# EAGLE board Adafruit-MacroPad-2040-rev-D (EAGLE 9.6.2)
REV: D
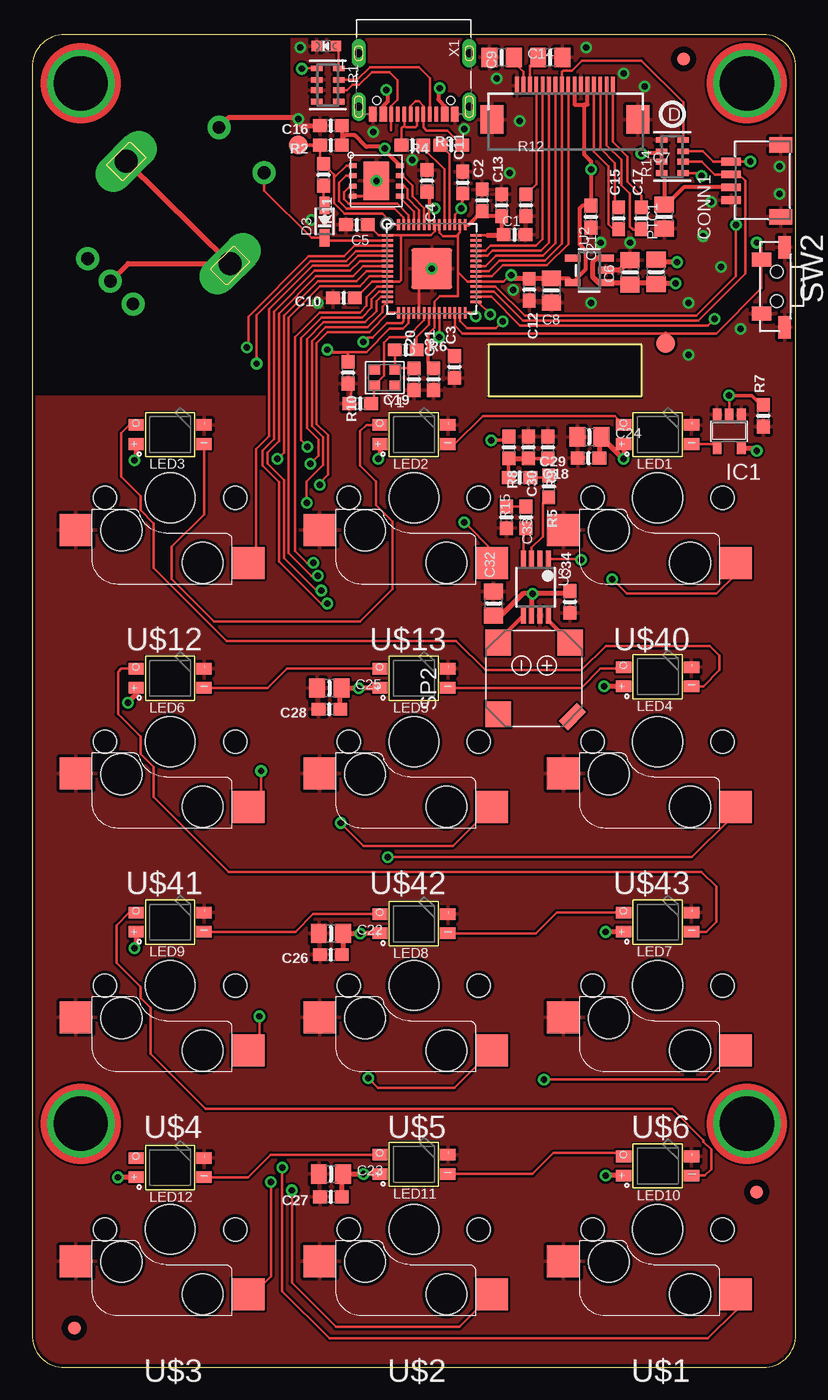
[diagram p0: board, top side]
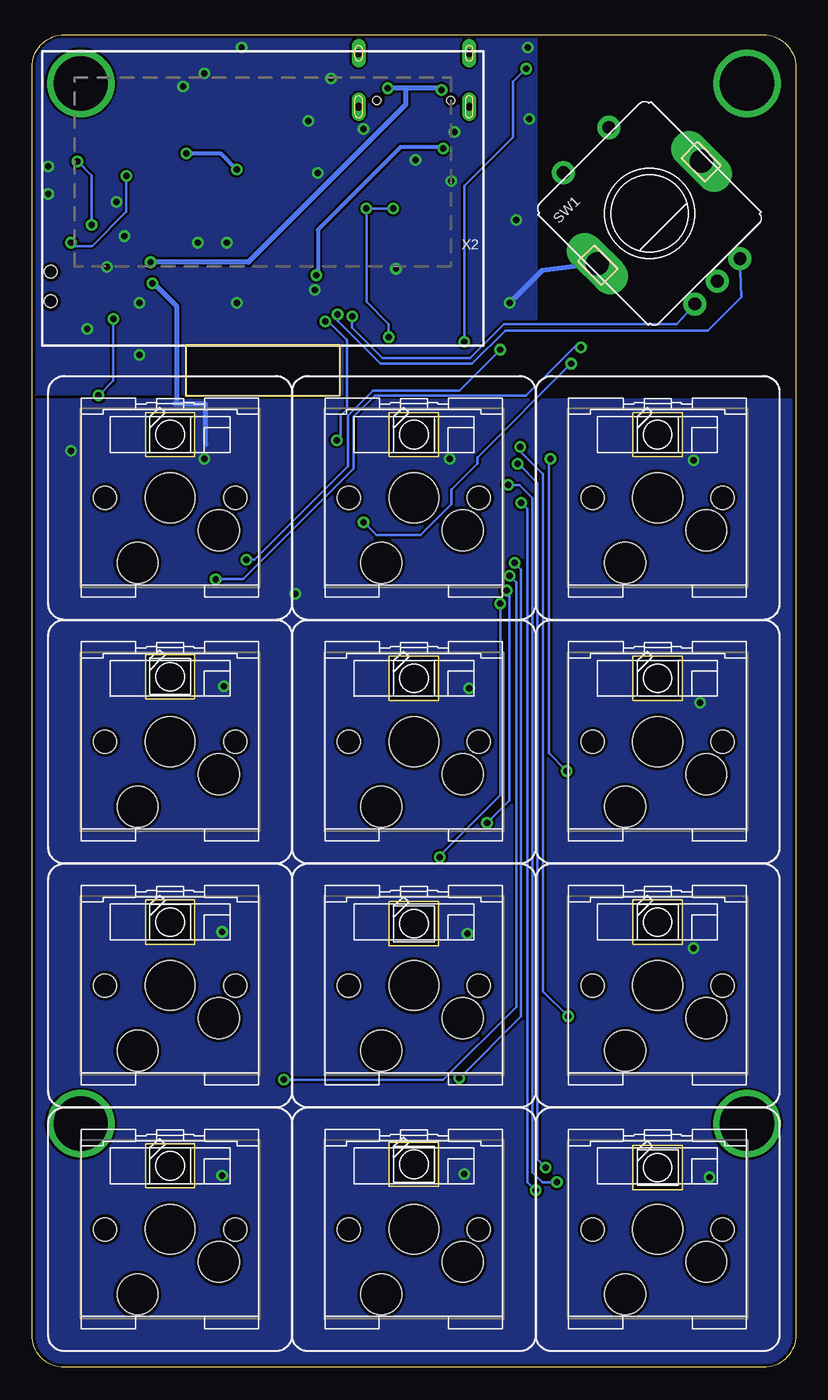
[diagram p1: board, bottom side, seen from below]

Size 59.69 x 104.14 mm. Coordinates in mm from the lower left corner, seen from the top.
Outline: 0,101.6 0,2.54 arc90 2.54,0 57.15,0 arc90 59.69,2.54 59.69,101.6 arc90 57.15,104.14 2.54,104.14 arc90 0,101.6
Copper layers (1*16): Top 0.035mm / dielectric 1.5mm / Bottom 0.035mm
Design rules "adafruit 7-7": minimum track width 7mil, minimum drill 15.5mil, track to track 7mil, track to pad 7mil, pad to pad 7mil, via to via 7mil, smd to smd 7mil, copper to edge 10mil, drill to drill 8mil, minimum pad ring 10mil, minimum via ring 8mil, stop-mask expansion 2mil, vias tented up to drill 20mil, thermal gap 10mil
Net classes: 1 power: width 0.254 mm; 2 5V: width 0.406 mm, drill 0.483 mm
tRestrict: area 35.6,75.7 to 47.8,80
bRestrict: area 35.6,75.7 to 47.8,80

## Footprints (pad centres in the part's own frame; a part is rotated, then mirrored left to right if it is on the bottom)
0603-NO = smd 1.075 x 1: 1 -0.85,0; 2 0.85,0
0805-NO = smd 1.24 x 1.5: 1 -0.95,0; 2 0.95,0
JST_SH4 = smd 0.6 x 1.55: 1 -1.5,2.006; 2 -0.5,2.006; 3 0.5,2.006; 4 1.5,2.006 | smd 1.2 x 1.8: MT1 -2.8,-1.894; MT2 2.8,-1.894
SOD-323 = smd 1.35 x 0.8: A 1.27,0; C -1.27,0
SOT23-5 = smd 0.69 x 0.99: 1 -0.95,-1.29; 2 0,-1.29; 3 0.95,-1.29; 4 0.95,1.3; 5 -0.95,1.3
QFN56_7MM_REDUCEDEPAD = smd 0.875 x 0.2: 1 -3.45,2.6; 2 -3.45,2.2; 3 -3.45,1.8; 4 -3.45,1.4; 5 -3.45,1; 6 -3.45,0.6; 7 -3.45,0.2; 8 -3.45,-0.2; 9 -3.45,-0.6; 10 -3.45,-1; 11 -3.45,-1.4; 12 -3.45,-1.8; 13 -3.45,-2.2; 14 -3.45,-2.6; 29 3.45,-2.6; 30 3.45,-2.2; 31 3.45,-1.8; 32 3.45,-1.4; 33 3.45,-1; 34 3.45,-0.6; 35 3.45,-0.2; 36 3.45,0.2; 37 3.45,0.6; 38 3.45,1; 39 3.45,1.4; 40 3.45,1.8; 41 3.45,2.2; 42 3.45,2.6 | smd 0.2 x 0.875: 15 -2.6,-3.45; 16 -2.2,-3.45; 17 -1.8,-3.45; 18 -1.4,-3.45; 19 -1,-3.45; 20 -0.6,-3.45; 21 -0.2,-3.45; 22 0.2,-3.45; 23 0.6,-3.45; 24 1,-3.45; 25 1.4,-3.45; 26 1.8,-3.45; 27 2.2,-3.45; 28 2.6,-3.45; 43 2.6,3.45; 44 2.2,3.45; 45 1.8,3.45; 46 1.4,3.45; 47 1,3.45; 48 0.6,3.45; 49 0.2,3.45; 50 -0.2,3.45; 51 -0.6,3.45; 52 -1,3.45; 53 -1.4,3.45; 54 -1.8,3.45; 55 -2.2,3.45; 56 -2.6,3.45 | smd 3.2 x 3.2: P$1 0,0
CHIPLED_0603_NOOUTLINE = smd 0.8 x 0.8: A 0,-0.75; C 0,0.75
NEO3535_REVERSE = smd 1.2 x 0.9 bottom: 1-VDD 2.65,-0.75; 2-DOUT 2.65,0.75; 3-GND -2.65,0.75; 4-DIN -2.65,-0.75
RESPACK_4X0603 = smd 0.45 x 0.9: 1 -1.3,-0.85; 2 -0.4,-0.85; 3 0.4,-0.85; 4 1.3,-0.85; 5 1.3,0.85; 6 0.4,0.85; 7 -0.4,0.85; 8 -1.3,0.85
BUZZER_SMT_7.5MM = smd 2 x 2: + 2.8,-2.8; - 2.8,2.8; MT2 -2.8,2.8 | smd 2 x 1 rotated 135: MT -3,-3
PEC11_SW_FIXED = drill 1 pad 1.8: P$1 -2.5,7; P$2 2.5,7; P$A -2.5,-7.5; P$B 2.5,-7.5; P$C 0,-7.5 | drill 1.8 pad 2.8 long: P$GND1 -5.65,0.1; P$GND2 5.75,0
SPST_TACTILE_RA = smd 1.1 x 1.5: 1 2.1,-0.9; 2 -2.1,-0.9 | smd 1.75 x 1: MT1 3.175,0.9; MT2 -3.075,0.9 | hole 1: 1.15,0.3; -1.15,0.3
SMT_NUT_3MM = drill 4.25 pad 4.572: P$1 0,0
TESTPOINT_ROUND_1.5MM_NO = smd 1.5 x 1.5: P$1 0,0
USON8_4X4 = smd 0.6 x 0.4: 1 -1.85,1.2; 2 -1.85,0.4; 3 -1.85,-0.4; 4 -1.85,-1.2; 5 1.85,-1.2; 6 1.85,-0.4; 7 1.85,0.4; 8 1.85,1.2 | smd 2 x 3: PAD 0,0
SOT23-5' = smd 0.55 x 1.2: 1 -0.95,-1.3; 2 0,-1.3; 3 0.95,-1.3; 4 0.95,1.3; 5 -0.95,1.3
MSOP8_0.65MM = smd 0.4 x 1.3: 1 -0.975,-2.2; 2 -0.325,-2.2; 3 0.325,-2.2; 4 0.975,-2.2; 5 0.975,2.2; 6 0.325,2.2; 7 -0.325,2.2; 8 -0.975,2.2
KAILH_SOCKET = smd 2.55 x 2.5 bottom: 1 6.09,5.08; 2 -7.36,2.5 | hole 3.9: 0,0 | hole 3.2: 2.54,5.08; -3.81,2.54 | hole 1.813: 5.08,0; -5.08,0
FIDUCIAL_1MM = smd 1 x 1: 1 0,0
USB_C_CUSB31-CFM2AX-01-X = smd 0.575 x 1.15: A1B12 -3.2,2.275; A4B9 -2.4,2.275; B1A12 3.2,2.275; B4A9 2.4,2.275 | smd 0.275 x 1.15: A5 -1.25,2.275; A6 -0.25,2.275; A7 0.25,2.275; A8 1.25,2.275; B5 1.75,2.275; B6 0.75,2.275; B7 -0.75,2.275; B8 -1.75,2.275 | drill 0.6 pad 1 long: M1 -4.32,1.7; M2 4.32,1.7; M3 -4.32,-2.48; M4 4.32,-2.48 | hole 0.65: 2.89,1.2; -2.89,1.2
ZJY130-2864KSWLG22 = smd 0.3 x 1.4 bottom: 1 3.75,-1.14; 2 3.25,-1.14; 3 2.75,-1.14; 4 2.25,-1.14; 5 1.75,-1.14; 6 1.25,-1.14; 7 0.75,-1.14; 8 0.25,-1.14; 9 -0.25,-1.14; 10 -0.75,-1.14; 11 -1.25,-1.14; 12 -1.75,-1.14; 13 -2.25,-1.14; 14 -2.75,-1.14; 15 -3.25,-1.14; 16 -3.75,-1.14 | smd 1.8 x 2.2 bottom: SUPPORT1 -5.7,1.488; SUPPORT2 5.7,1.488
CRYSTAL_2.5X2 = smd 0.9 x 0.75: 1 -0.825,-0.625; 2 0.825,-0.625; 3 0.825,0.625; 4 -0.825,0.625

## Placement (x,y rotation side)
C1  1uF  [0603-NO]  37.72,88.52 0 top
C2  1uF  [0603-NO]  35.18,91.19 90 top
C3  0.1uF  [0603-NO]  33.02,78.17 90 top
C4  0.1uF  [0603-NO]  30.86,92.71 270 top
C5  0.1uF  [0603-NO]  25.4,89.28 180 top
C6  10uF  [0805-NO]  46.73,85.56 90 top
C7  10uF  [0805-NO]  49.4,89.92 90 top
C8  10uF  [0805-NO]  40.59,84.14 270 top
C9  10uF  [0805-NO]  40.51,102.36 180 top
C10  0.1uF  [0603-NO]  24.38,83.57 180 top
C11  1uF  [0603-NO]  33.66,92.58 90 top
C12  0.1uF  [0603-NO]  38.86,84.2 270 top
C13  0.1uF  [0603-NO]  36.7,90.81 90 top
C14  10uF  [0805-NO]  36.7,102.36 0 top
C15  1uF  [0603-NO]  45.85,89.79 90 top
C16  0.1uF  [0603-NO]  23.37,97.03 180 top
C17  1uF  [0603-NO]  47.62,89.79 90 top
C18  0.1uF  [0603-NO]  38.1,69.53 0 top
C19  22pF  [0603-NO]  25.65,75.31 0 top
C20  22pF  [0603-NO]  29.84,77.22 90 top
C21  0.1uF  [0603-NO]  43.69,89.92 90 top
C22  10uF  [0805-NO]  23.37,33.91 0 top
C23  10uF  [0805-NO]  23.37,15.11 0 top
C24  10uF  [0805-NO]  43.56,72.71 0 top
C25  10uF  [0805-NO]  23.24,53.09 0 top
C26  0.1uF  [0603-NO]  23.37,32.26 180 top
C27  0.1uF  [0603-NO]  23.37,13.34 180 top
C28  0.1uF  [0603-NO]  23.24,51.44 180 top
C29  0.1uF  [0603-NO]  43.5,71.06 180 top
C30  10nF  [0603-NO]  38.8,71.88 270 top
C31  0.1uF  [0603-NO]  31.37,77.22 90 top
C32  10uF  [0805-NO]  36.07,59.69 90 top
C33  0.1uF  [0603-NO]  37.08,66.42 270 top
C34  0.1uF  [0603-NO]  42.04,59.82 90 top
CONN1  STEMMA_I2C_QT  [JST_SH4]  56.64,92.71 90 top
D3  1N4148  [SOD-323]  22.86,89.53 90 top
IC1  74HCT1G125DBV  [SOT23-5]  54.48,73.15 180 top
IC3  RP2040_QFN56  [QFN56_7MM_REDUCEDEPAD]  31.24,85.85 0 top
L  RED  [CHIPLED_0603_NOOUTLINE]  22.99,103.25 90 top
LED1  WS2812B_SK6812E  [NEO3535_REVERSE]  48.9,72.9 0 bottom
LED2  WS2812B_SK6812E  [NEO3535_REVERSE]  29.84,72.9 0 bottom
LED3  WS2812B_SK6812E  [NEO3535_REVERSE]  10.79,72.9 0 bottom
LED4  WS2812B_SK6812E  [NEO3535_REVERSE]  48.9,53.98 0 bottom
LED5  WS2812B_SK6812E  [NEO3535_REVERSE]  29.84,53.85 0 bottom
LED6  WS2812B_SK6812E  [NEO3535_REVERSE]  10.79,53.85 0 bottom
LED7  WS2812B_SK6812E  [NEO3535_REVERSE]  48.9,34.8 0 bottom
LED8  WS2812B_SK6812E  [NEO3535_REVERSE]  29.84,34.67 0 bottom
LED9  WS2812B_SK6812E  [NEO3535_REVERSE]  10.79,34.8 0 bottom
LED10  WS2812B_SK6812E  [NEO3535_REVERSE]  48.9,15.75 0 bottom
LED11  WS2812B_SK6812E  [NEO3535_REVERSE]  29.84,15.88 0 bottom
LED12  WS2812B_SK6812E  [NEO3535_REVERSE]  10.79,15.62 0 bottom
PTC1  500mA  [0805-NO]  48.77,85.6 90 top
R1  5.1K Pack  [RESPACK_4X0603]  23.11,100.2 270 top
R2  10K  [0603-NO]  23.37,95.5 180 top
R3  22  [0603-NO]  29.72,95.5 0 top
R4  22  [0603-NO]  32.77,95.5 180 top
R5  47K  [0603-NO]  40.39,68.83 270 top
R6  1K  [0603-NO]  29.21,79.5 0 top
R7  10K  [0603-NO]  57.15,74.36 90 top
R8  1K  [0603-NO]  37.27,71.88 270 top
R9  DNP  [0603-NO]  40.32,71.88 270 top
R10  10K  [0603-NO]  24.7,77.72 270 top
R11  1K  [0603-NO]  22.78,93.18 270 top
R12  680K  [0603-NO]  38.61,90.81 90 top
R14  5.1K Pack  [RESPACK_4X0603]  50.04,94.61 90 top
R15  47K  [0603-NO]  38.61,66.42 270 top
SP2  7.5mm SPK  [BUZZER_SMT_7.5MM]  39.24,53.85 90 top
SW1  PEC11  [PEC11_SW_FIXED]  11.43,90.17 45 bottom
SW2  RA SW  [SPST_TACTILE_RA]  57.91,84.45 270 top
TP1  SEWTAP_SMTNUTM3  [SMT_NUT_3MM]  3.81,19.05 0 top
TP2  SEWTAP_SMTNUTM3  [SMT_NUT_3MM]  55.88,19.05 0 top
TP3  SEWTAP_SMTNUTM3  [SMT_NUT_3MM]  3.81,100.33 0 top
TP4  SEWTAP_SMTNUTM3  [SMT_NUT_3MM]  55.88,100.33 0 top
TP5  [TESTPOINT_ROUND_1.5MM_NO]  49.53,80.01 0 top
TP6  [TESTPOINT_ROUND_1.5MM_NO]  20.83,95.5 0 top
U1  W25Q64  [USON8_4X4]  26.91,92.71 0 top
U2  RT9080/AP2112K-3.3  [SOT23-5']  43.56,85.72 90 top
U3  PAM8302  [MSOP8_0.65MM]  39.37,60.96 180 top
U$1  SOCKET  [KAILH_SOCKET]  48.9,10.79 180 bottom
U$2  SOCKET  [KAILH_SOCKET]  29.84,10.79 180 bottom
U$3  SOCKET  [KAILH_SOCKET]  10.79,10.79 180 bottom
U$4  SOCKET  [KAILH_SOCKET]  10.79,29.84 180 bottom
U$5  SOCKET  [KAILH_SOCKET]  29.84,29.84 180 bottom
U$6  SOCKET  [KAILH_SOCKET]  48.9,29.84 180 bottom
U$12  SOCKET  [KAILH_SOCKET]  10.79,67.94 180 bottom
U$13  SOCKET  [KAILH_SOCKET]  29.84,67.94 180 bottom
U$34  FIDUCIAL_1MM  [FIDUCIAL_1MM]  50.93,102.23 0 top
U$35  FIDUCIAL_1MM  [FIDUCIAL_1MM]  3.31,3.1 0 top
U$40  SOCKET  [KAILH_SOCKET]  48.9,67.94 180 bottom
U$41  SOCKET  [KAILH_SOCKET]  10.79,48.9 180 bottom
U$42  SOCKET  [KAILH_SOCKET]  29.84,48.9 180 bottom
U$43  SOCKET  [KAILH_SOCKET]  48.9,48.9 180 bottom
U$78  [MACROPAD_TOP]  59.44,0.51 0 bottom
U$79  [MACROPAD_BOTTOM]  0,0 0 top
U$80  FIDUCIAL_1MM  [FIDUCIAL_1MM]  56.64,13.72 0 top
U$81  [PCBFEAT-REV-040]  50.04,97.92 0 top
X1  TYPE C  [USB_C_CUSB31-CFM2AX-01-X]  29.84,100.2 180 top
X2  ZJY130-2864KSWLG22  [ZJY130-2864KSWLG22]  41.66,99 180 bottom
Y1  12MHz/12pF  [CRYSTAL_2.5X2]  27.56,77.34 180 top

## Library data of the parts
C1-C7 C9-C34 D3 PTC1 R1-R12 R14 R15 TP5 TP6 U1 U3 Y1 = microbuilder
C8 = microbuilder; COMPANY: ADAFRUIT INDUSTRIES; DRAWN: KTOWN; REV: D
CONN1 = adafruit_electromech; LCSC: C2845363
IC1 = 74xx-little-us; ROT: 270
IC3 = adafruit_micro; LCSC: C2040
L = microbuilder; ROT: 270
LED1-LED12 = microbuilder; ROT: 180
SP2 = microbuilder; ROT: 0
SW1 TP1-TP4 = adafruit_electromech; FORCETHM: 1
SW2 = adafruit_electromech; LCSC: C778159
U2 = adafruit_power; JLC_ROTATION: 0
U$1-U$6 U$12 U$13 U$40-U$43 = adafruit_electromech; ROT: 180; XOFFSET: -.5; YOFFSET: 3.75
U$34 U$35 U$80 = microbuilder; BOM: EXCLUDE
U$78 U$79 = keeb_silks
U$81 = microbuilder; REV: D
X1 = adafruit_electromech; LCSC: C165948
X2 = adafruit_display

## Nets
1.2V: C3.2 C4.2 C11.1 IC3.23 IC3.45 IC3.50
3.3V [power]: C1.1 C2.1 C5.1 C7.2 C8.1 C10.1 C12.1 C13.1 C16.1 C21.2 C31.2 CONN1.2 IC3.1 IC3.10 IC3.22 IC3.33 IC3.42 IC3.43 IC3.44 IC3.48 IC3.49 R2.1 R14.6 R14.7 R14.8 U1.8 U2.5 X2.5 X2.7
5.0V [5V]: C6.1 C22.2 C23.2 C24.2 C25.2 C26.1 C27.1 C28.1 C29.1 C32.1 C34.2 IC1.5 LED1.1-VDD LED2.1-VDD LED3.1-VDD LED4.1-VDD LED5.1-VDD LED6.1-VDD LED7.1-VDD LED8.1-VDD LED9.1-VDD LED10.1-VDD LED11.1-VDD LED12.1-VDD PTC1.1 U2.1 U2.3 U3.6
!RESET: IC3.26 R14.1 SW2.2 TP5.P$1
CC1: R1.7 X1.A5
CC2: R1.6 X1.B5
D+: IC3.47 R3.2
D-: IC3.46 R4.2
GND: C1.2 C2.2 C3.1 C4.1 C5.2 C6.2 C7.1 C8.2 C9.1 C10.2 C11.2 C12.2 C13.2 C14.1 C16.2 C19.1 C20.1 C21.1 C22.1 C23.1 C24.1 C25.1 C26.2 C27.2 C28.2 C29.2 C30.1 C31.1 C32.2 C33.2 C34.1 CONN1.1 CONN1.MT1 CONN1.MT2 IC1.1 IC1.3 IC3.19 IC3.P$1 L.C LED1.3-GND LED2.3-GND LED3.3-GND LED4.3-GND LED5.3-GND LED6.3-GND LED7.3-GND LED8.3-GND LED9.3-GND LED10.3-GND LED11.3-GND LED12.3-GND R1.2 R1.3 R7.1 R9.1 R10.2 R12.1 R14.5 SW1.P$2 SW1.P$C SW1.P$GND1 SW1.P$GND2 SW2.1 SW2.MT1 SW2.MT2 U1.4 U1.PAD U2.2 U3.7 U$1.2 U$2.2 U$3.2 U$4.2 U$5.2 U$6.2 U$12.2 U$13.2 U$40.2 U$41.2 U$42.2 U$43.2 X1.A1B12 X1.B1A12 X2.6 X2.16 X2.SUPPORT1 X2.SUPPORT2
GP1: IC3.3 U$40.1
GP2: IC3.4 U$13.1
GP3: IC3.5 U$12.1
GP4: IC3.6 U$43.1
GP5: IC3.7 U$42.1
GP6: IC3.8 U$41.1
GP7: IC3.9 U$6.1
GP8: IC3.11 U$5.1
GP9: IC3.12 U$4.1
GP10: IC3.13 U$1.1
GP11: IC3.14 U$2.1
GP12: IC3.15 U$3.1
IN+: R5.2 U3.3
IN-: R15.2 U3.4
LED: IC3.16 R1.1
MISO: IC3.40
MOSI: IC3.39 X2.12
N$1: R3.1 X1.A6 X1.B6
N$2: L.A R1.8
N$3: R4.1 X1.A7 X1.B7
N$4: D3.A R11.2
N$5: C19.2 IC3.20 Y1.3
N$6: C20.2 R6.1 Y1.1
N$7: IC3.21 R6.2
N$8: C18.2 R5.1
N$10: LED1.2-DOUT LED2.4-DIN
N$11: LED2.2-DOUT LED3.4-DIN
N$12: LED4.2-DOUT LED5.4-DIN
N$13: LED5.2-DOUT LED6.4-DIN
N$14: LED7.2-DOUT LED8.4-DIN
N$15: LED8.2-DOUT LED9.4-DIN
N$16: LED10.2-DOUT LED11.4-DIN
N$17: LED11.2-DOUT LED12.4-DIN
N$18: LED3.2-DOUT LED4.4-DIN
N$19: LED6.2-DOUT LED7.4-DIN
N$20: LED9.2-DOUT LED10.4-DIN
N$21: R12.2 X2.13
N$22: SP2.- U3.5
N$23: C17.1 X2.2
N$24: C17.2 X2.1
N$25: C15.1 X2.4
N$26: C15.2 X2.3
N$27: SP2.+ U3.8
N$30: C33.1 R15.1
N$100: C18.1 C30.2 R8.2 R9.2
NEOPIX: IC1.2 IC3.30 R7.2
NEOPIX_5V: IC1.4 LED1.4-DIN
OLED_CS: IC3.34 X2.8
OLED_DC: IC3.36 X2.10
OLED_RST: IC3.35 R14.4 X2.9
QSPI_CS: IC3.56 R2.2 R11.1 TP6.P$1 U1.1
QSPI_DATA[0]: IC3.53 U1.5
QSPI_DATA[1]: IC3.55 U1.2
QSPI_DATA[2]: IC3.54 U1.3
QSPI_DATA[3]: IC3.51 U1.7
QSPI_SCK: IC3.52 U1.6
ROTA: IC3.28 SW1.P$A
ROTB: IC3.29 SW1.P$B
SCK: IC3.38 X2.11
SCL: CONN1.4 IC3.32 R14.3
SDA: CONN1.3 IC3.31 R14.2
SPEAKER: IC3.27 R8.1
SPKR_SD: IC3.17 R10.1 U3.1
USBBOOT: D3.C IC3.2 SW1.P$1
VBUS: PTC1.2 X1.A4B9 X1.B4A9
VCC: C14.2 X2.15
VCOMH: C9.2 X2.14

## Tracks (layer width: path | path; a pad name or v marks a point on that pad's centre or on a via)
1.2V  (via drill 0.5)
  Top 0.203: IC3.50 31.04,91.68 C4.2 31.11,91.61 31.11,90.55 v31.47,90.55 | IC3.45 33.04,90.06 33.53,90.55 v33.55,90.55 33.55,90.99 33.66,91.1 C11.1 | C3.2 31.84,80.2 IC3.23 31.84,80.51 v31.81,80.51
  Bottom 0.203: v31.81,80.51 31.81,81.52 33.55,83.26 v33.55,90.55 v31.47,90.55
3.3V  (via drill 0.5)
  Top 0.203: IC3.49 31.5,89.3 | 31.5,89.3 IC3.48 31.84,88.68 32.13,88.39 33.15,88.39 33.27,88.52 | IC3.43 33.84,89.41 33.55,89.41 IC3.44 33.44,88.69 33.27,88.52 | C5.1 27.08,88.45 IC3.1 28.83,88.45 | 28.83,88.45 31.18,88.45 31.5,88.77 31.5,89.3 | 33.27,85.6 33.27,88.52 | 33.27,85.6 34.02,84.85 IC3.33 36.85,84.85 37.34,85.34 | C10.1 25.27,83.57 26.56,84.85 IC3.10 28.72,84.85 28.83,84.96 28.83,88.45 | IC3.42 35.62,88.45 | 33.27,85.6 33.27,83.69 31.88,83.69 31.44,83.26 IC3.22 31.44,81.26 30.93,80.75
  Top 0.254: C31.2 30.93,78.5 30.93,80.75
  Top 0.305: X2.5 43.41,98.68 43.15,98.68 | 43.15,98.68 43.15,94.77 43.69,94.23 v43.69,93.6 C21.2 43.01,90.77 42.8,90.55 42.8,87.76 43.24,87.31 43.24,85.76 U2.5 41.95,85.09 C8.1 | X2.7 42.41,98.68 43.15,98.68 | CONN1.2 50.94,92.21 49.59,90.87 | C16.1 R2.1 24.22,96.01 24.47,96.27 25.23,96.27 26.12,95.38 27.29,95.38 27.56,95.11 | IC3.43 34.15,89.3 C2.1 35.56,89.95 C13.1 36.7,88.52 C1.1 | C7.2 49.4,93.1 R14.8 R14.7 R14.6 49.04,94.87 v47.62,94.87 | v37.47,85.34 37.34,85.34 | U1.8 27.56,95.11 | 27.56,95.11 v27.56,95.25
  Top 0.406: 49.59,90.87 C7.2 | C8.1 38.82,85.09 | 35.62,88.45 36.8,88.45 C1.1 | C12.1 38.82,85.09 | 38.82,85.09 37.72,85.09 v37.47,85.34
  Bottom 0.305: v47.62,94.87 44.96,94.87 v43.69,93.6 | v27.56,95.25 27.69,95.25 27.81,95.38 30.86,95.38 37.34,88.9 37.34,85.47 v37.47,85.34
5.0V  (via drill 0.5)
  Top 0.406: LED3.1-VDD 8.14,71.01 v8,70.87 | LED2.1-VDD 27.2,71.14 v27.05,70.99 | LED1.1-VDD 46.24,71.01 v46.23,70.99 C24.2 44.35,72.54 C29.1 | LED4.1-VDD 44.72,53.23 v44.7,53.21 | LED5.1-VDD v25.54,53.1 | v25.54,53.1 v25.53,53.09 | LED6.1-VDD 8.14,52.59 v7.49,51.94 | LED9.1-VDD 8.14,32.91 v8,32.77 | LED8.1-VDD 25.67,33.92 v25.65,33.91 C22.2 24.32,32.36 C26.1 | LED7.1-VDD 44.84,34.05 v44.83,34.04 | LED10.1-VDD 44.84,15 v44.83,14.99 | LED11.1-VDD 27.18,15.11 v25.91,15.11 C23.2 24.22,15.01 C27.1 | LED12.1-VDD 6.74,14.87 v6.73,14.86 | U2.3 44.13,86.67 43.81,86.36 43.81,85.22 44.26,84.78 U2.1 46.57,84.78 C6.1 46.83,84.71 48.83,84.71 | v56.64,71.63 56.42,71.85 IC1.5 | v25.54,53.1 24.2,53.1 C25.2 24.09,52.99 C28.1 | PTC1.1 48.83,84.71 | 48.83,84.71 v50.29,84.71 | v39.12,60.45 39.05,60.38 U3.6 | v39.12,60.45 38.35,60.45 36.64,58.74 C32.1 | C34.2 41.82,60.45 v39.12,60.45
  Bottom 0.406: v50.29,84.71 50.16,84.71 48.39,82.93 48.39,75.44 48.51,75.31 46.16,75.31 46.16,72.19 46.1,72.14
  pour Bottom: 0,75.56 59.69,75.56 59.69,0 0,0
!RESET  (via drill 0.5)
  Top 0.203: R14.1 52.1,93.31 v52.32,93.09 | v56.64,87.88 57.01,87.51 SW2.2 57.01,84.32 53.47,80.77 49.53,80.77 33.66,80.77 33.04,81.39 IC3.26
  Top 0.406: TP5.P$1 49.53,80.77
  Bottom 0.203: v52.32,93.09 52.32,90.3 54.99,87.63 56.39,87.63 v56.64,87.88
CC1
  Top 0.203: R1.7 25.42,100.6 26.42,101.6 30.23,101.6 31.09,100.73 X1.A5
CC2
  Top 0.203: R1.6 24.62,99.8 25.04,100.22 25.58,100.22 26.57,101.22 27.94,101.22 28.57,100.58 28.57,99.06 28.07,98.55 28.07,96.69 X1.B5
D+
  Top 0.203: R3.2 30.57,95.29 32.24,93.61 IC3.47
D-
  Top 0.203: R4.2 32.64,94.78 IC3.46
GND  (via drill 0.5)
  Top 0.203: IC3.19 30.24,85.85 | U1.4 26.8,91.51 26.8,92.71 v26.92,92.71 | C19.1 25.13,77.3 R10.2
  Top 0.254: 30.24,85.85 IC3.P$1
  Top 0.406: C6.2 45.94,85.72 U2.2 | SW1.P$C 7.51,86.25 SW1.P$GND1 SW1.P$GND2 | SW1.P$2 15.38,97.65 20.46,97.65 21.08,97.03 C16.2
  Bottom 0.406: SW1.P$GND1 19.86,85.68 v22.35,83.19
  other vias: 46.23,101.09 36.32,100.71 43.31,103.12 47.88,100.08 58.42,93.85 58.42,91.69 53.09,91.06 37.34,93.34 37.59,84.2 43.69,83.19 52.45,88.39 46.74,87.88 44.45,87.88 31.24,85.85 26.67,96.52 33.78,96.77 20.95,103.12 29.72,94.36 20.83,97.54 21.84,89.66 38.1,97.41 51.31,83.19 53.85,85.98 55.37,81.15 51.31,79.12
  pour Top: 0,75.82 20.32,75.82 20.32,104.14 59.69,104.14 59.69,0 0,0
  pour Bottom: 20.32,104.01 59.82,104.01 59.82,76.07 20.32,76.07
GP1  (via drill 0.5)
  Top 0.203: IC3.3 27.77,87.63 25.2,87.63 24.4,86.83 21.62,86.83 16.92,82.12 16.92,79.82 v16.79,79.7 | v45.34,61.59 46.48,60.45 53.47,60.45 54.98,61.97 U$40.1
  Bottom 0.203: v16.79,79.7 17.06,79.97 21.09,75.95 32.89,75.95 34.54,74.3 34.54,70.23 43.18,61.59 v45.34,61.59
GP2  (via drill 0.5)
  Top 0.203: IC3.4 27.77,87.23 25.34,87.23 24.55,86.45 21.78,86.45 17.55,82.22 v17.55,78.43 | v33.78,66.04 36.07,63.75 36.07,62.23 35.94,62.36 U$13.1
  Bottom 0.203: v17.55,78.43 24.89,71.09 24.89,70.62 26.92,68.59 26.92,67.44 29.34,65.02 32.77,65.02 v33.78,66.04
GP3
  Top 0.203: IC3.5 25.49,86.85 24.71,86.07 21.94,86.07 18.54,82.67 18.54,72.77 17.53,71.75 17.53,63.51 U$12.1
GP4  (via drill 0.5)
  Top 0.203: IC3.6 25.63,86.45 24.87,85.69 22.1,85.69 18.92,82.52 18.92,72.55 18.03,71.66 18.03,70.45 19.3,69.18 19.3,62.97 22.58,59.69 v23.09,59.69 | v27.81,39.88 51.56,39.88 54.48,42.8 54.48,43.56 54.74,43.81 U$43.1
  Bottom 0.203: v23.09,59.69 23.09,44.73 27.81,40.01 v27.81,39.88
GP5  (via drill 0.5)
  Top 0.203: IC3.7 25.89,86.05 25.11,85.27 22.22,85.27 19.3,82.36 19.3,72.39 18.41,71.5 18.41,70.61 19.68,69.34 19.68,63.25 22.23,60.71 v22.61,60.71 | v24.13,42.55 25.91,40.77 32.89,40.77 U$42.1
  Bottom 0.203: v22.61,60.71 22.36,60.46 22.36,44.31 v24.13,42.55
GP6  (via drill 0.5)
  Top 0.203: IC3.8 26.14,85.65 25.36,84.87 22.36,84.87 19.68,82.2 19.68,71.5 v19.18,70.99 | v17.91,46.61 17.91,44.84 U$41.1
  Bottom 0.203: v17.91,46.61 19.3,48.01 19.3,70.87 v19.18,70.99
GP7  (via drill 0.5)
  Top 0.203: IC3.9 26.39,85.25 25.63,84.49 22.51,84.49 20.07,82.04 20.07,63.64 21.86,61.85 v22.35,61.85 | v40.01,22.48 40.02,22.5 52.72,22.5 U$6.1
  Bottom 0.203: v22.35,61.85 21.84,61.34 21.84,28.19 27.56,22.48 v40.01,22.48
GP8  (via drill 0.5)
  Top 0.203: IC3.11 26.98,84.45 26.16,83.63 26.16,82.96 25.62,82.42 22.48,82.42 20.57,80.51 20.57,63.8 21.51,62.87 v21.97,62.87 | v26.29,22.61 27.05,21.84 33.01,21.84 U$5.1
  Bottom 0.203: v26.29,22.61 21.46,27.43 21.46,62.36 v21.97,62.87
GP9  (via drill 0.5)
  Top 0.203: IC3.12 27.12,84.05 26.54,83.47 26.54,82.8 25.78,82.04 22.64,82.04 21.02,80.42 21.02,72.45 v21.53,71.94 | v17.78,27.43 17.78,25.66 U$4.1
  Bottom 0.203: v21.53,71.94 21.53,71.56 19.75,69.79 19.75,29.4 v17.78,27.43
GP10  (via drill 0.5)
  Top 0.203: U$1.1 54.98,4.44 52.83,2.29 23.24,2.29 19.56,5.97 v19.56,15.62 | v21.75,70.61 22.38,71.25 22.38,72.52 21.49,73.41 21.49,80.36 22.8,81.66 26.04,81.66 26.92,82.55 26.92,83.32 27.26,83.65 IC3.13
  Bottom 0.203: v19.56,15.62 20.19,16.26 20.19,69.12 21.69,70.61 v21.75,70.61
GP11  (via drill 0.5)
  Top 0.203: IC3.14 27.41,82.87 27.41,82.47 26.22,81.28 22.96,81.28 21.87,80.2 21.87,73.56 22.76,72.67 22.76,70.51 21.46,69.22 v21.46,67.56 | v20.32,13.84 20.32,6.6 23.75,3.17 33.4,3.17 U$2.1
  Bottom 0.203: v21.46,67.56 20.95,67.06 20.95,14.48 v20.32,13.84
GP12  (via drill 0.5)
  Top 0.203: IC3.15 27.88,82.4 26.38,80.9 23.11,80.9 22.25,80.04 22.25,73.72 23.14,72.83 23.14,69.75 22.42,69.03 v22.48,68.96 | v18.67,14.48 18.67,7.11 16.76,5.21 16.76,5.59 U$3.1
  Bottom 0.203: v22.48,68.96 21.59,68.96 20.57,67.94 20.57,15.24 19.81,14.48 v18.67,14.48
IN+
  Top 0.203: U3.3 39.05,64.05 39.93,64.94 39.93,67.53 R5.2
IN-
  Top 0.203: R15.2 38.4,65.36 U3.4
LED  (via drill 0.5)
  Top 0.203: IC3.16 29.04,81.75 28.9,81.61 27.74,81.61 26.6,80.46 26.22,80.46 v25.9,80.15 | v21.08,101.47 21.11,101.5 R1.1
  Bottom 0.203: v25.9,80.15 25.9,92.34 22.1,96.14 22.1,100.46 v21.08,101.47
MOSI
  Top 0.203: X2.12 39.91,88.17 39.37,87.63 35.83,87.63 35.45,87.25 IC3.39
N$1
  Top 0.203: X1.B6 29.09,97.04 | R3.1 28.87,96.81 29.09,97.04 | 29.09,97.04 29.23,96.9 29.97,96.9 30.09,97.02 X1.A6
N$2
  Top 0.203: L.A 23.96,103.02 R1.8
N$3
  Top 0.203: R4.1 32.47,96.65 30.85,96.65 30.59,96.9 X1.B7 30.59,98.56 30.23,98.93 29.97,98.93 29.59,98.56 X1.A7
N$4
  Top 0.203: R11.2 22.78,90.88 D3.A
N$5
  Top 0.203: C19.2 26.73,75.08 Y1.3 27.5,77.48 27.5,80.07 27.94,80.52 29.34,80.52 30.64,81.82 IC3.20
N$6
  Top 0.203: R6.1 28.36,78.07 C20.2 28.48,78.07 Y1.1
N$7
  Top 0.203: IC3.21 31.04,81.5 30.06,80.52 R6.2
N$8
  Top 0.203: R5.1 40.23,69.53 C18.2
N$10
  Top 0.203: LED2.4-DIN 33.03,72.15 35.23,74.35 45.55,74.35 LED1.2-DOUT
N$11
  Top 0.203: LED3.4-DIN 13.45,66.66 10.92,64.14 10.92,61.59 14.22,58.29 25.65,58.29 28.19,60.83 28.19,66.08 26.9,67.37 26.9,69.23 25.65,70.48 25.65,73.15 26.15,73.65 LED2.2-DOUT
N$12
  Top 0.203: LED5.4-DIN 42.94,53.1 44.44,54.6 46.12,54.6 LED4.2-DOUT
N$13
  Top 0.203: LED6.4-DIN 18.43,53.1 19.93,54.6 LED5.2-DOUT
N$14
  Top 0.203: LED8.4-DIN 39.38,33.92 41.01,35.55 LED7.2-DOUT
N$15
  Top 0.203: LED9.4-DIN 20.59,34.05 21.97,35.43 27.18,35.43 LED8.2-DOUT
N$16
  Top 0.203: LED11.4-DIN 39.13,15.12 40.77,16.76 45.98,16.76 LED10.2-DOUT
N$17
  Top 0.203: LED12.4-DIN 16.9,14.87 18.66,16.62 LED11.2-DOUT
N$18
  Top 0.203: LED3.2-DOUT 7.61,73.65 6.99,73.03 6.99,69.6 8.49,68.09 8.49,66.99 9.53,65.95 9.53,62.45 15.21,56.77 33.15,56.77 35.43,54.48 42.93,54.48 44.83,56.39 52.96,56.39 53.72,55.63 53.72,54.48 52.46,53.23 LED4.4-DIN
N$19
  Top 0.203: LED6.2-DOUT 6.97,54.6 6.73,54.36 6.73,51.05 8.49,49.3 8.49,47.94 9.53,46.9 9.53,44.58 15.37,38.73 52.32,38.73 53.47,37.59 53.47,34.8 52.72,34.05 LED7.4-DIN
N$20
  Top 0.203: LED10.4-DIN 52.59,15 53.09,15.49 53.09,17.03 52.48,17.64 52.48,17.75 50.04,20.19 13.59,20.19 9.27,24.51 9.27,28.11 8.49,28.89 8.49,29.74 6.6,31.62 6.6,34.54 7.61,35.55 LED9.2-DOUT
N$21
  Top 0.203: R12.2 39.41,92.45 X2.13
N$22
  Top 0.305: U3.5 36.45,56.81 36.45,55.88 36.44,55.89 SP2.-
N$23
  Top 0.203: X2.2 44.91,95.5 46.05,94.36 46.05,92.38 46.74,91.69 46.74,89.15 46.99,88.9 47.59,88.9 C17.1
N$24
  Top 0.203: X2.1 45.41,95.75 46.55,94.61 46.55,92.64 47.62,91.57 C17.2
N$25
  Top 0.203: X2.4 43.91,94.99 45.05,93.85 45.05,89.33 45.44,88.94 C15.1
N$26
  Top 0.203: X2.3 44.41,95.25 45.55,94.1 45.55,90.94 C15.2
N$27
  Top 0.305: U3.8 40.34,58.35 SP2.+
N$30
  Top 0.203: R15.1 C33.1
N$100
  Top 0.254: R9.2 C30.2 38.75,71.03 | C18.1 37.25,70.94 37.34,71.03 R8.2
  Top 0.406: R8.2 38.75,71.03
NEOPIX  (via drill 0.5)
  Top 0.203: v54.48,75.95 IC1.2 | v53.34,81.92 52.83,81.41 38.14,81.41 35.9,83.65 IC3.30
  Top 0.254: R7.2 57,75.21 56.26,75.95 v54.48,75.95
  Bottom 0.203: v53.34,81.92 53.34,77.09 v54.48,75.95
NEOPIX_5V
  Top 0.203: LED1.4-DIN 53.24,72.15 IC1.4
OLED_CS
  Top 0.203: IC3.34 35.96,85.25 36.82,86.11 40.26,86.11 41.91,87.76 X2.8
OLED_DC
  Top 0.203: X2.10 40.91,87.83 39.94,86.87 36.27,86.87 35.45,86.05 IC3.36
OLED_RST
  Top 0.203: R14.4 50.89,98.84 47.62,102.11 42.97,102.11 42.2,101.33 41.52,101.33 41.41,101.22 X2.9 41.41,87.8 40.1,86.49 36.55,86.49 35.71,85.65 IC3.35
QSPI_CS
  Top 0.203: IC3.56 28.27,89.3 27.4,90.17 24.43,90.17 23.62,90.98 23.62,92.96 | 23.62,92.96 24.57,93.91 U1.1 | R2.2 22.52,95.25 22.52,94.3 R11.1 23.62,93.19 23.62,92.96
  Top 0.254: TP6.P$1 22.26,95.5 22.52,95.25
QSPI_DATA[0]
  Top 0.203: IC3.53 29.84,90.3 28.76,91.38 U1.5
QSPI_DATA[1]
  Top 0.203: U1.2 24.53,93.11 24,92.58 24,91.13 24.59,90.55 28.32,90.55 28.85,90.02 28.86,90.02 29.04,89.83 IC3.55
QSPI_DATA[2]
  Top 0.203: IC3.54 29.44,90.04 28.55,90.93 25.8,90.93 25.79,90.93 24.74,90.93 24.38,91.29 24.38,91.82 24.87,92.31 U1.3
QSPI_DATA[3]
  Top 0.203: IC3.51 30.62,89.32 30.62,90.6 29.72,91.5 29.72,92.33 28.94,93.11 U1.7
QSPI_SCK
  Top 0.203: U1.6 29.1,92.31 29.34,92.07 29.34,91.34 30.24,90.44 IC3.52
ROTA  (via drill 0.5)
  Top 0.203: IC3.28 34.41,82.4 v34.67,82.14
  Bottom 0.203: v34.67,82.14 34.67,81.25 32.29,78.87 25.46,78.87 22.8,81.53 9.29,81.53 SW1.P$A
ROTB  (via drill 0.5)
  Top 0.203: v35.81,82.3 34.86,83.25 IC3.29
  Bottom 0.203: SW1.P$B 4.25,83.64 6.86,81.03 22.7,81.03 25.31,78.42 32.45,78.42 35.81,81.79 v35.81,82.3
SCK
  Top 0.203: IC3.38 35.59,86.85 35.99,87.25 39.79,87.25 40.41,87.87 X2.11
SCL  (via drill 0.5)
  Top 0.203: R14.3 52.43,95.02 53.24,94.21 CONN1.4 56.11,94.21 v56.13,94.23 | IC3.32 36.23,84.45 38.51,82.17 51.91,82.17 55.02,85.28 v55.02,89.28
  Bottom 0.203: v55.02,89.28 55.02,93.12 v56.13,94.23
SDA
  Top 0.203: R14.2 52.34,94.22 53.35,93.21 CONN1.3 55.25,93.21 55.75,92.71 55.75,85.47 52.07,81.79 38.35,81.79 36.09,84.05 IC3.31
SPEAKER  (via drill 0.5)
  Top 0.203: IC3.27 33.44,81.75 33.98,81.21 36.27,81.21 v36.78,81.72
  Top 0.254: R8.1 37,72.45 v35.88,72.45
  Bottom 0.203: v36.78,81.72 36.51,81.72 35.05,80.26 35.05,74.86 35.56,74.36 35.56,72.77 v35.88,72.45
SPKR_SD  (via drill 0.5)
  Top 0.203: IC3.17 29.42,82.38 29.42,81.59 28.99,81.15 27.95,81.15 26.15,79.35 23.27,79.35 v23.09,79.53 23.34,79.28 24.61,79.28 24.7,79.18 R10.1 | v42.93,63.12 42.87,63.18 40.37,63.18 U3.1
  Bottom 0.203: v23.09,79.53 26.29,76.33 33.05,76.33 34.99,74.39 34.99,70.42 42.29,63.12 v42.93,63.12
USBBOOT
  Top 0.203: IC3.2 22.97,88.05 22.81,88.21 D3.C 21.84,88.27 18.15,91.95 SW1.P$1
VBUS  (via drill 0.5)
  Top 0.254: 32.24,98.56 X1.A4B9
  Top 0.305: X1.B4A9 27.45,98.56 27.81,98.93 27.81,99.69 | v31.88,99.95 31.75,99.82 31.75,99.06 32.24,98.56
  Top 0.406: 27.81,99.69 v27.69,99.82 | v50.42,86.36 48.96,86.36 PTC1.2
  Bottom 0.406: v27.69,99.82 27.81,99.95 30.48,99.95 | 30.48,99.95 v31.88,99.95 | 30.48,99.95 30.48,98.68 42.8,86.36 v50.42,86.36
VCC
  Top 0.203: X2.15 38.41,101.23 37.66,101.98 C14.2
VCOMH
  Top 0.203: X2.14 38.91,101.7 C9.2